# Altium PCB MAGIsCM4Core.PcbDoc
Units mm, origin at the board's own origin, x right, y up, seen from the top; angles counter-clockwise.
Board outline 41.1 x 41.3 mm, 4 copper layers (Component Side, Ground Plane, Signal Layer 1, Solder Side), stack 0.844 mm thick; 35 components, 65 nets, 195 pads, 70 vias.
Unrouted connection lines stored in the file: 2.
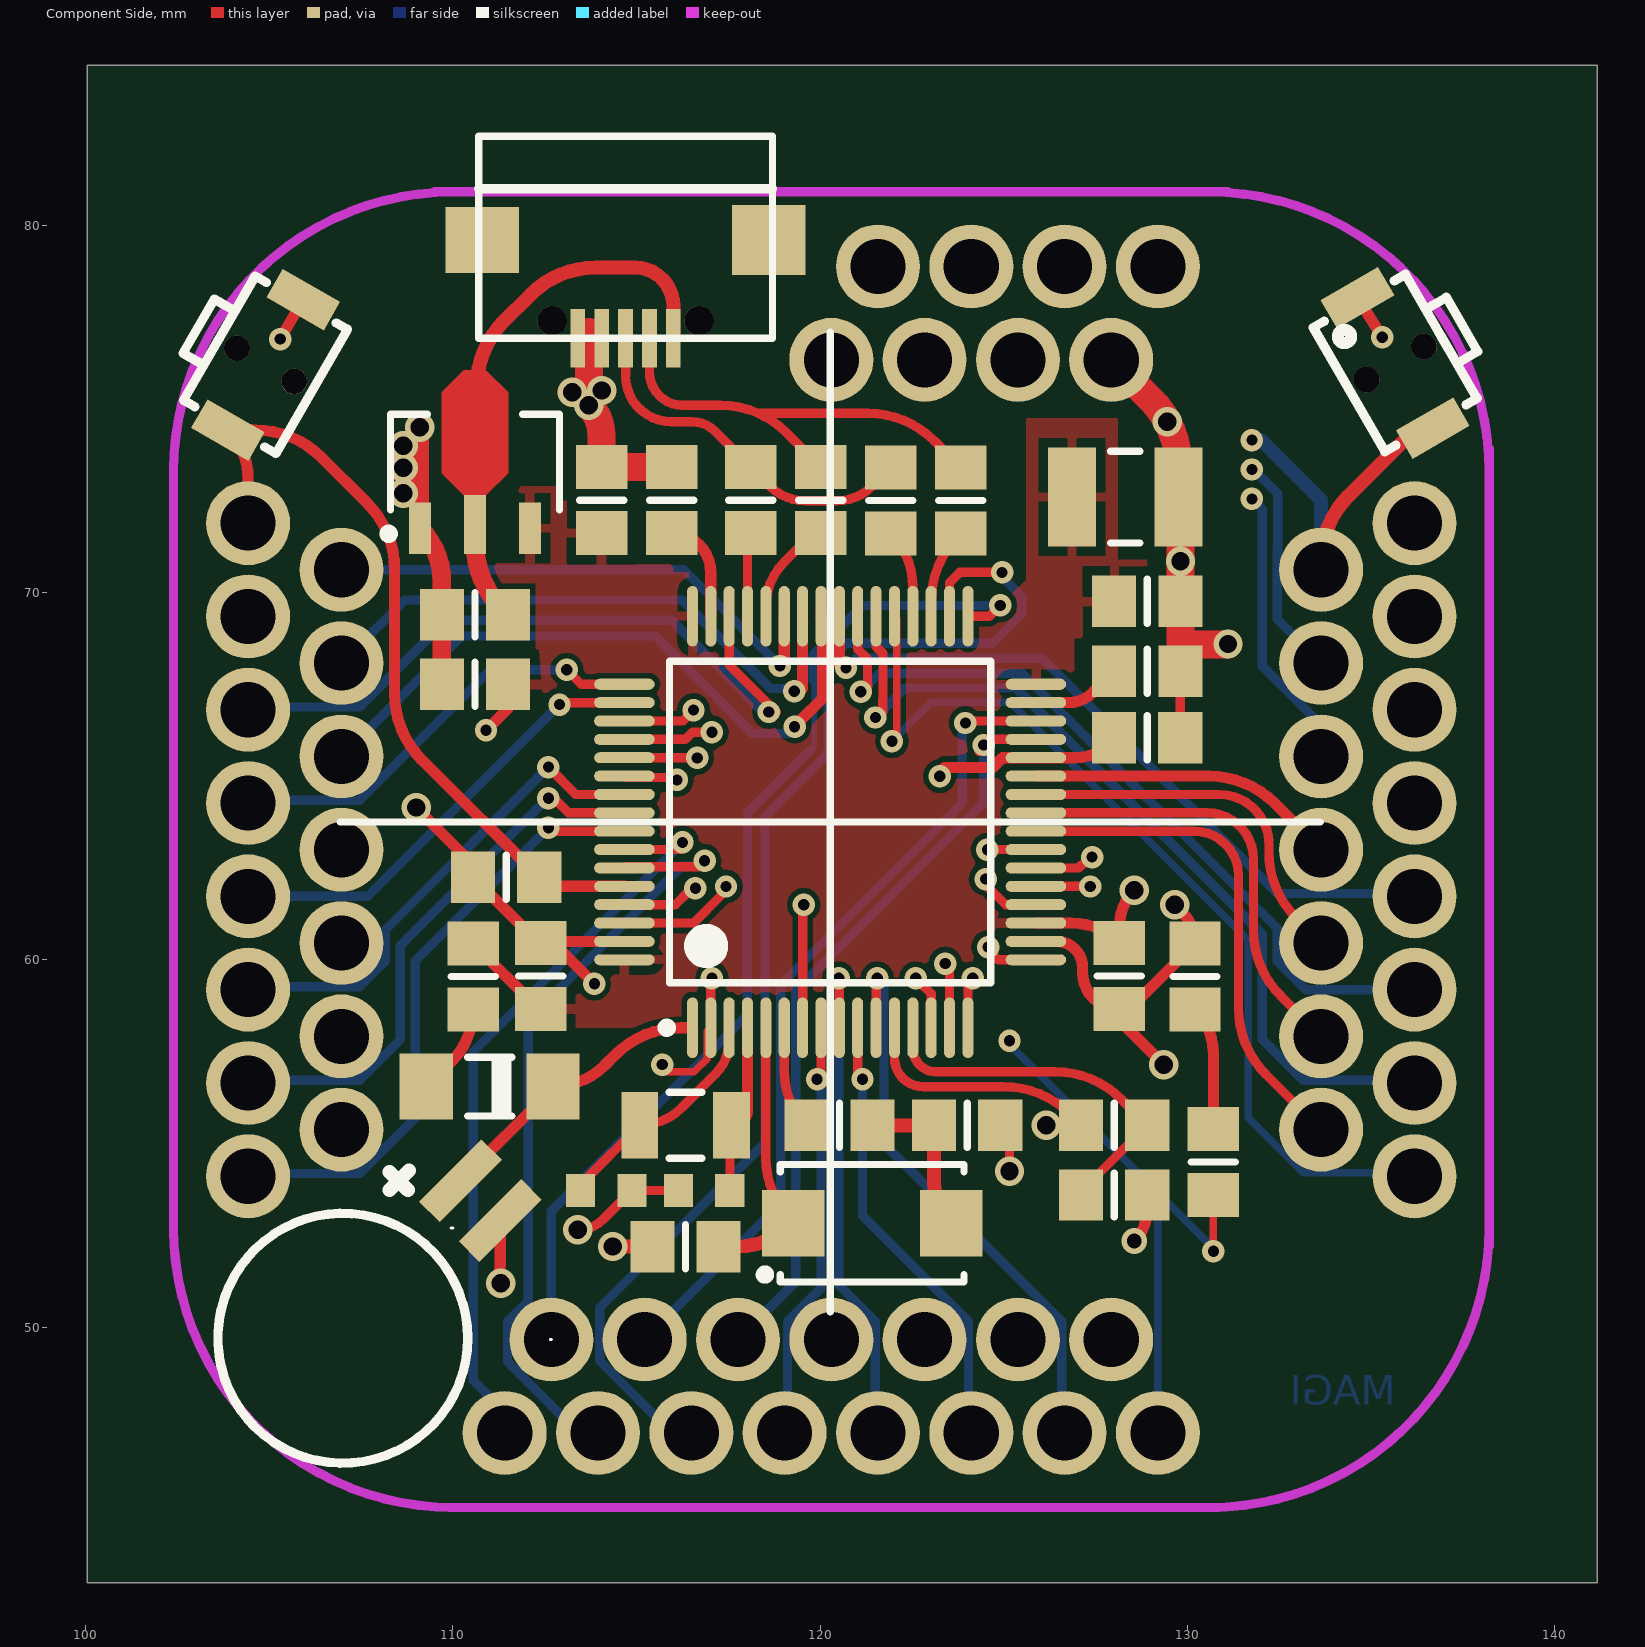
[diagram p0: Component Side view]
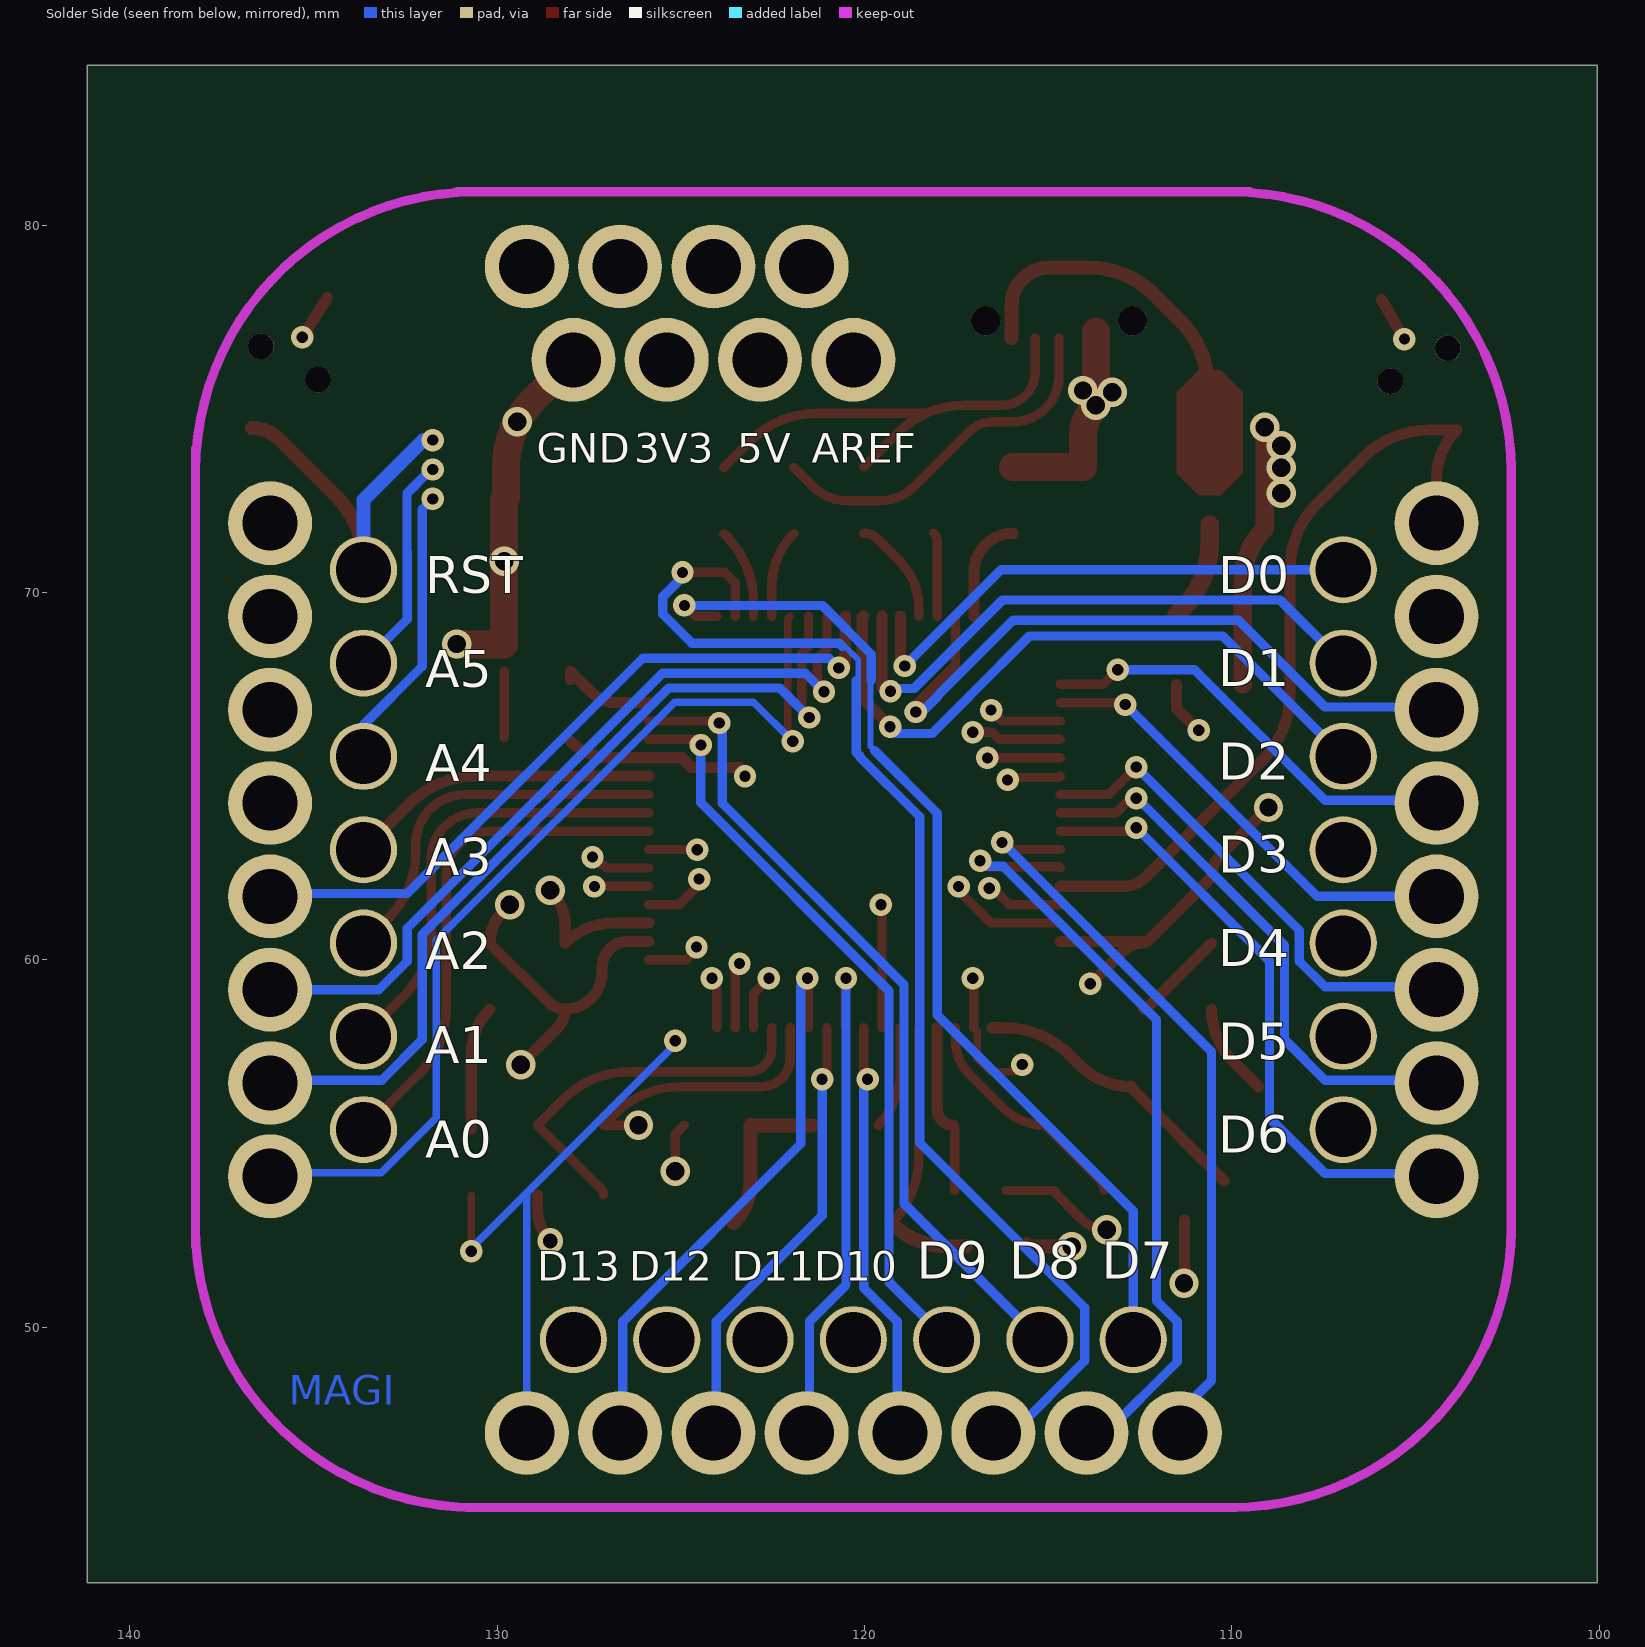
[diagram p1: Solder Side view, seen from below]
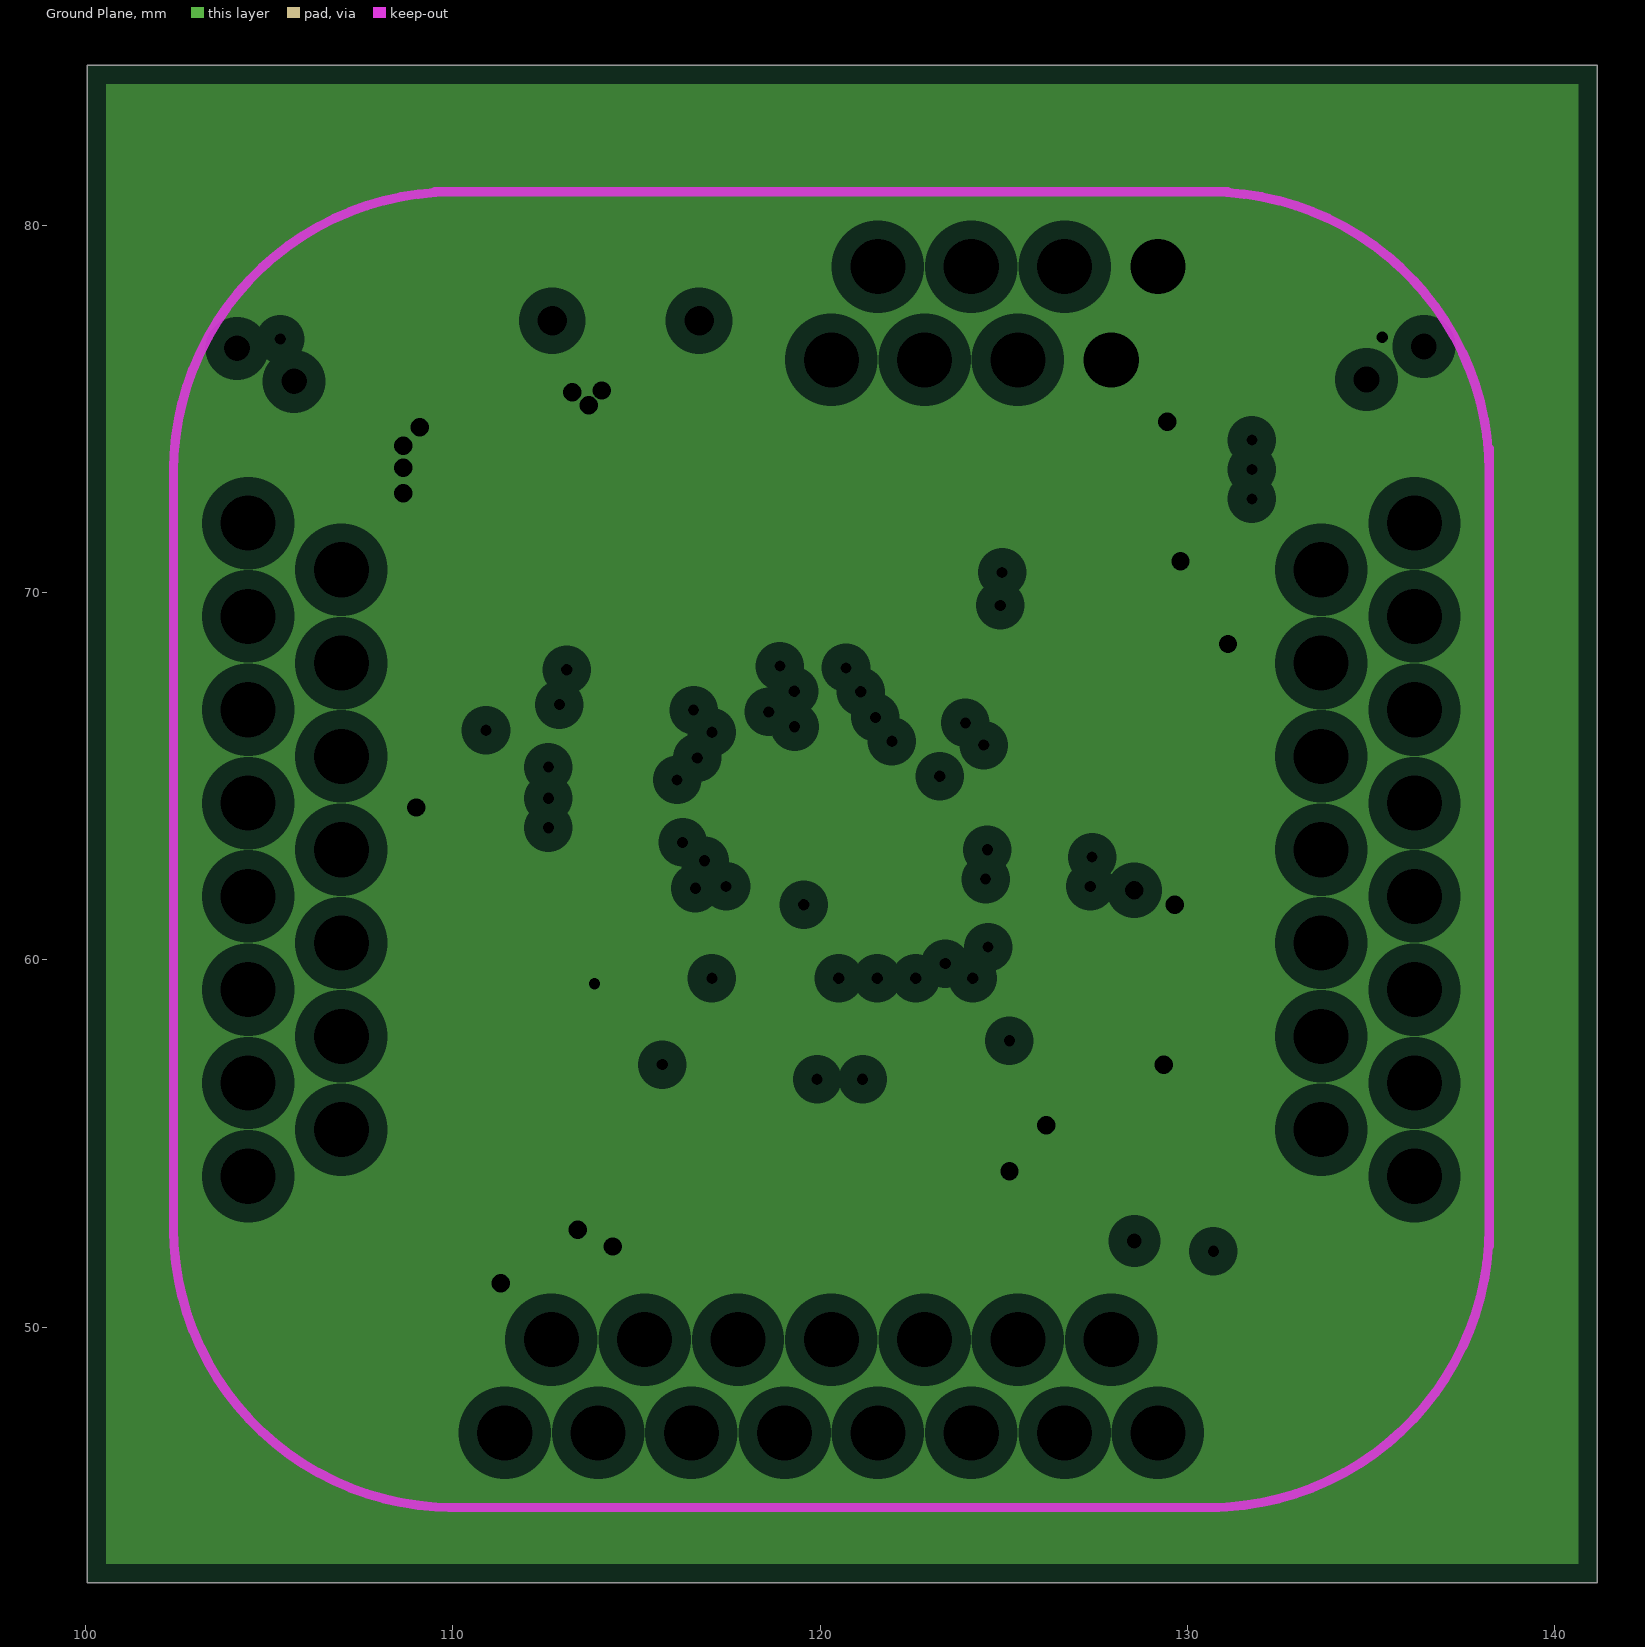
[diagram p2: Ground Plane, clearances drawn from the general rule]
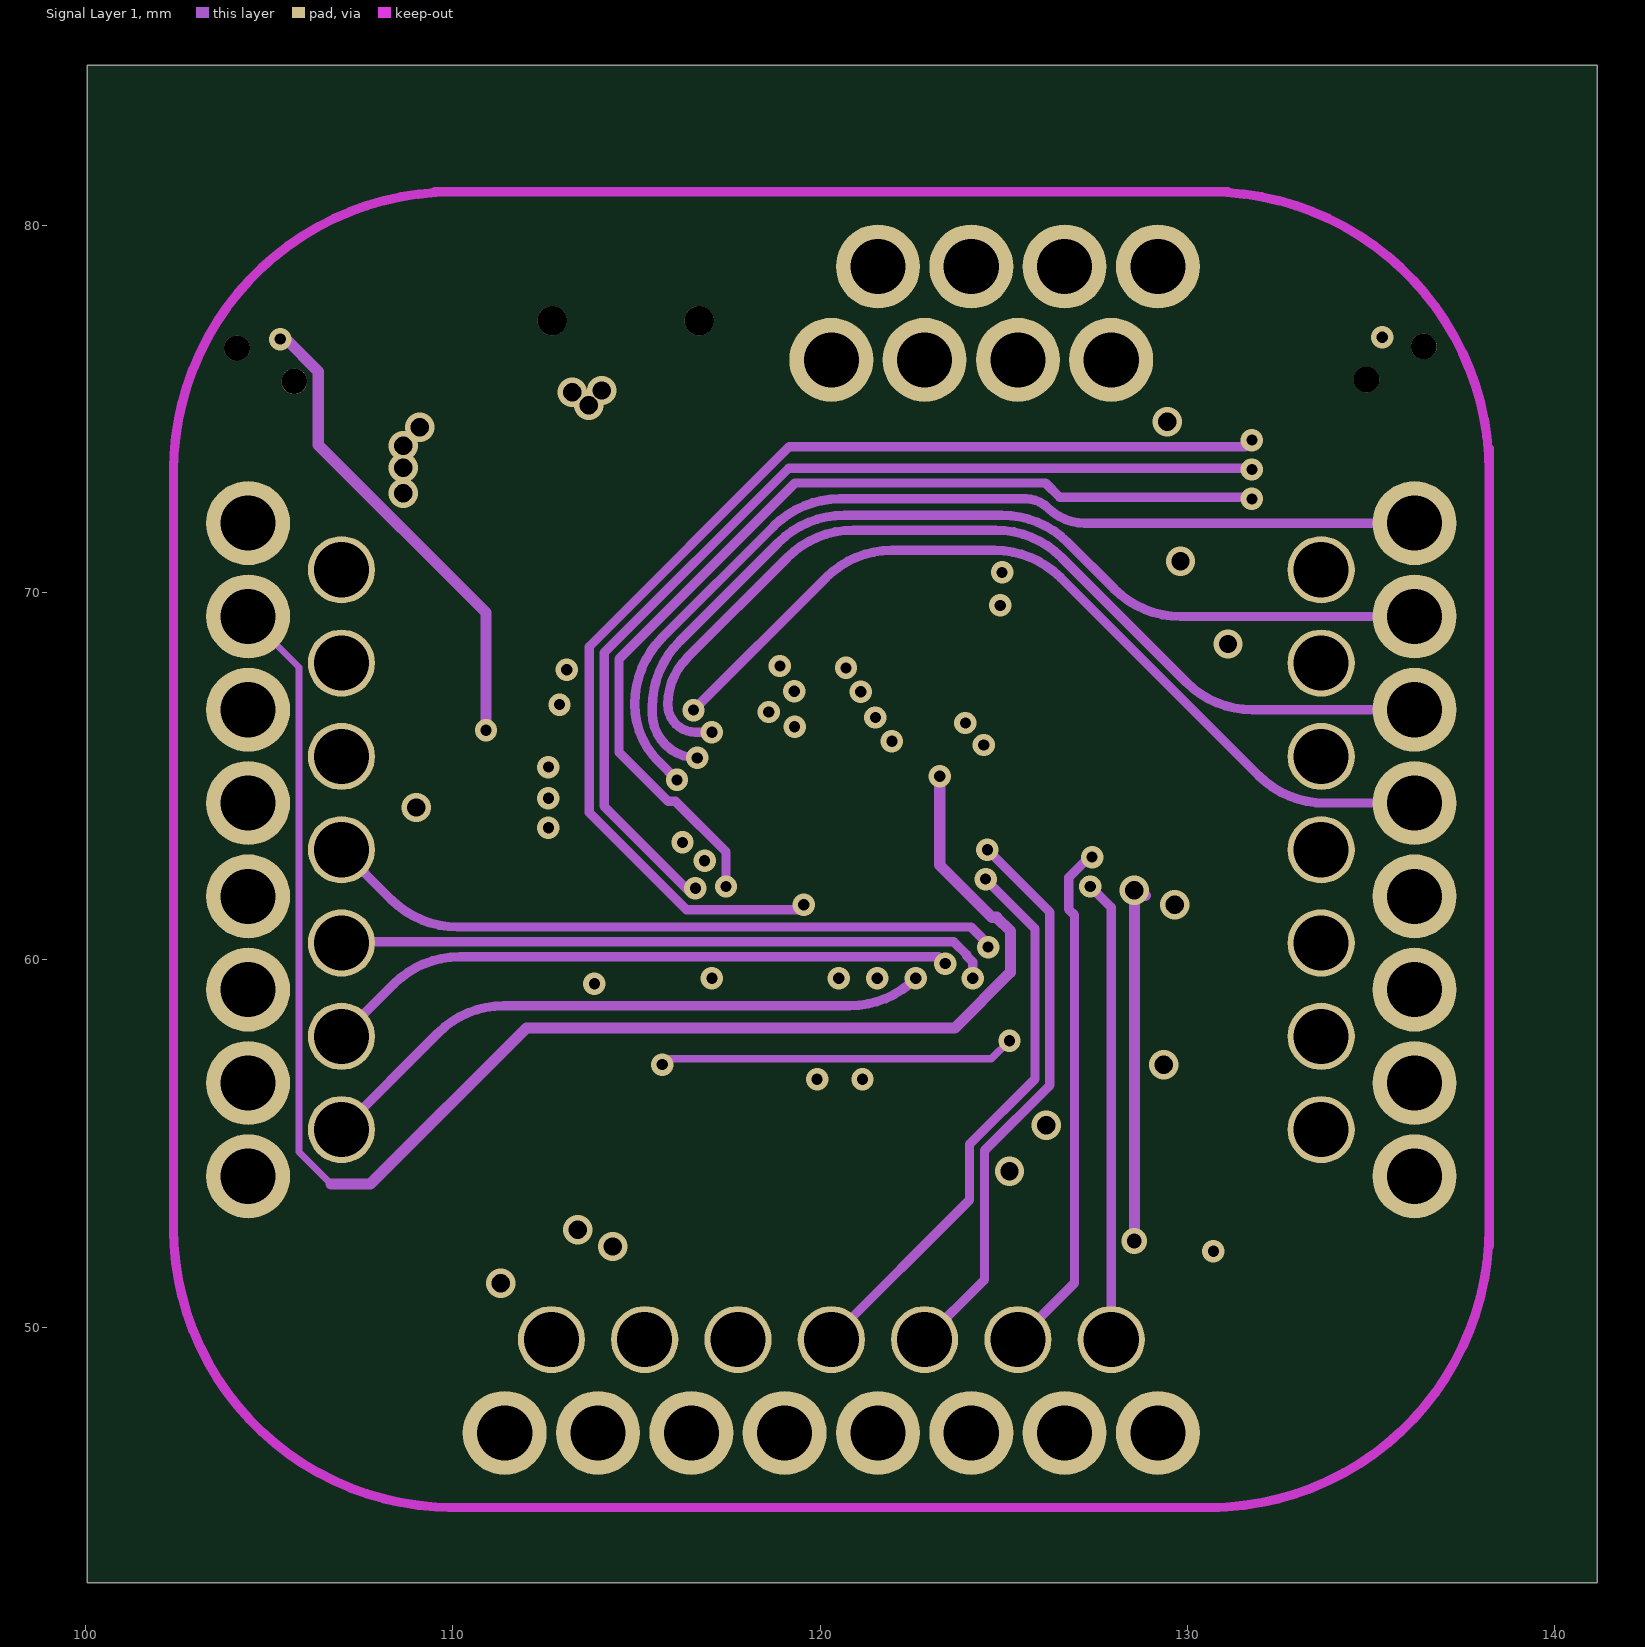
[diagram p3: Signal Layer 1]

## Layer stack, top to bottom
Top Solder: solder mask 0.0102, Solder Resist, Dk 3.5
Component Side: signal copper 0.0356
Dielectric 1: core 0.32, FR-4, Dk 4.8
Ground Plane: plane copper 0.036, net GND
Dielectric 3: prepreg 0.127, Dk 4.2
Signal Layer 1: signal copper 0.036
Dielectric 4: core 0.254, Dk 4.2
Solder Side: signal copper 0.0356
Bottom Solder: solder mask 0.0102, Solder Resist, Dk 3.5

## Board outline
100.05,84.35 141.15,84.35 141.15,43.15 141.15,43.05 100.05,43.05

## Design rules (kind name [scope] priority, off if disabled: settings)
Clearance Clearance_1 [InPolygon vs InNet('3.3V')] p1: gap=0.152
Clearance [All] p2: gap=0.152
ComponentClearance [All] p1: gap=0.254 collisioncheckmode=3 verticalgap=0.152 showdistances=FALSE
HoleToHoleClearance [All] p1: gap=0.152 allowstackedmicrovias=TRUE
PlaneClearance [All] p1: clearance=0.508
PlaneConnect [All] p1: planeconnectstyle=Relief reliefexpansion=0.508 reliefentries=4 reliefconductorwidth=0.254 reliefairgap=0.254
PolygonConnect [All] p1: connectstyle=Relief reliefconductorwidth=0.254 reliefentries=4 polygonreliefangle="90 Angle" airgapwidth=0.254
RoutingVias [All] p1: holewidth=0.305 width=0.61 viastyle="Through Hole" minholewidth=0.305 minwidth=0.61 maxholewidth=7.112 maxwidth=12.7
SolderMaskExpansion [All] p1: expansion=0.102
Width [All] p1: maxlimit=2.54 minlimit=0.152 preferedwidth=0.254
25 further rules are at their usual default settings.

## Components (designator, comment, footprint, x,y, rotation, side; value= is the part's Value field where it differs from the comment)
C1 "10uf" 6-0805_n 110.6,69.4 r180 top
C2 "10uf" 6-0805_n 110.6,67.5 r180 top
C3 "CAP" 6-0805_N 128.9,67.855 r180 top
C4 "CAP" 6-0805_N 115.951,72.517 r270 top
C5 "15PF" 6-0805_n 116.332,52.197 r0 top
C6 "15PF" 6-0805_n 124,55.5 r180 top
C7 "CAP" 6-0805_N 128,55.5 r180 top
C8 "15PF" 1608[0603] 114.173,53.721 r180 top
C9 "15PF" 1608[0603] 116.84,53.721 r0 top
C10 "10uf" C1210_N 128.3,72.6 r0 top
C11 "10uf" 3.3V0.2F-RK 110.75,53.45 r135 top
C12 "CAP" 6-0805_N 114.046,72.517 r270 top
C13 "CAP" 6-0805_N 112.395,59.563 r270 top
C14 "CAP" 6-0805_N 128.143,59.563 r90 top
C15 "CAP" 6-0805_N 128.9,69.76 r180 top
D1 "SOD123" LL34 111,56.55 r0 top
J1 "MAGIsBoard-2x" MAGIsBoard-2x 120.3,63 r0 top
L1 "INDUCTOR" 6-0805_n 128,53.6 r0 top
LED1 "LED_3" 6-0805_N 130.2,59.55 r90 top
R1 "10K" 6-0805_n 120.015,72.517 r90 top
R2 "10K" 6-0805_n 123.825,72.506 r90 top
R3 "10K" 6-0805_n 118.11,72.517 r90 top
R4 "10K" 6-0805_n 121.92,72.506 r90 top
R5 "10K" 6-0805_n 120.523,55.499 r0 top
R6 "10K" 6-0805_n 110.55,59.55 r270 top
R7 "RES1_1" 6-0805_N 130.7,54.5 r270 top
R8 "RES1_1" 6-0805_N 111.45,62.25 r0 top
R9 "RES1_1" 6-0805_N 128.9,66.05 r180 top
S1 "SW-PB" SKRELGE010 104.9,76.2 r240 top
S2 "SW-PB" SKRELGE010 135.65,76.25 r120 top
U1 "USB" microUSB 114.7,77.5 r0 top
U2 "STM32F415RG" STM32F415RG 120.269,63.754 r90 top
U3 "HS7333" HS7333 110.6,73.55 r90 top
X1 "8M" 5032 121.666,52.832 r270 top
X2 "32.768k" 3215 116.332,55.499 r0 top

## Footprints (in the part's own frame and the unit in brackets; to place one, negate y for a bottom-side part, rotate by r counter-clockwise, add the part's x,y. Pads: shape width x height; smd on the part's side, far side on the other; paste and mask are expansions set on the pad)
3.3V0.2F-RK [mm]
  rect 0.8x2.4 smd: 1(0.762,0) 2(-0.762,0)
  silkscreen extent -3.4,0.8 3.4,8.7
6-0805_n [mm] "Chip Resistor, Body 2.0x1.2mm, IPC Medium Density"
  rect 1.2x1.4 smd: 1(-0.9,0) 2(0.9,0)
  silkscreen extent 0,-0.6 0,0.6, body extent -1.07,-0.7 1.07,0.7, height 0.7
6-0805_N [mm] "Chip Resistor, Body 2.0x1.2mm, IPC Medium Density"
  rect 1.2x1.4 smd: 1(-0.9,0) 2(0.9,0)
  silkscreen extent 0,-0.6 0,0.6, body extent -1.07,-0.7 1.07,0.7, height 0.7
1608[0603] [mm] "Chip Capacitor, Body 1.6x0.8mm, IPC High Density"
  rect 0.8x0.9 smd: 1(-0.7,0) 2(0.7,0)
  body extent -0.87,-0.48 0.87,0.48, height 1.3
3215 [mm]
  rect 1x1.8 smd: 1(-1.25,0) 2(1.25,0)
  silkscreen extent -0.45,-0.9 0.45,0.9
5032 [mm]
  rect 1.8x1.7 smd: 1(0,-2.404) 2(0,1.896)
  silkscreen extent -1.6,-3.3 1.6,2.25
C1210_N [mm] "Chip Capacitor, Body 3.2x2.5mm, IPC Medium Density"
  rect 1.3x2.7 smd: 1(-1.45,0) 2(1.45,0)
  silkscreen extent -0.4,-1.25 0.4,1.25, body extent -1.7,-1.35 1.7,1.35, height 1.5
HS7333 [mm] "SOT89, 3-Leads, Body 4.50x2.50mm, Pitch 1.50mm, Lead Span 4.1mm, IPC Medium Density"
  rect 1.4x0.6 smd: 1(-1.8,1.5) 3(-1.8,-1.5)
  rect 1.6x0.6 smd: 2(-1.7,0)
  Component Side region: -0.9,0.3 -0.3,0.9 1.9,0.9 2.5,0.3 2.5,-0.3 1.9,-0.9 -0.3,-0.9 -0.9,-0.3
  silkscreen extent -2.07,-2.3 1.3,2.47, body extent -1.3,-2.3 1.3,2.3, height 1.6
LL34 [mm] "MELF Diode, 2-Leads, Body 3.50x1.50mm, IPC Low Density"
  rect 1.45x1.8 smd: 1(-1.725,0) 2(1.725,0)
  silkscreen extent -0.6,-0.8 0.6,0.8, body extent -1.85,-0.77 1.85,0.77, height 1.53
MAGIsBoard-2x [mil]
  round 90 hole 59.06: 1(300,525) 1(350,625) 2(200,525) 2(250,625) 3(100,525) 3(150,625) 4(0,525) 4(50,625) 29(-625,350) 30(-625,250) 31(-625,150) 32(-625,50) 33(-625,-50) 34(-625,-150) 35(-625,-250) 36(-625,-350) 37(-350,-625) 38(-250,-625) 39(-150,-625) 40(-50,-625) 41(50,-625) 42(150,-625) 43(250,-625) 44(350,-625) 45(625,-350) 46(625,-250) 47(625,-150) 48(625,-50) 49(625,50) 50(625,150) 51(625,250) 52(625,350)
  round 90 / inner round 72 / far side round 72 hole 59.06: 8(-525,300) 9(-525,200) 10(-525,100) 11(-525,0) 12(-525,-100) 13(-525,-200) 14(-525,-300) 15(-300,-525) 16(-200,-525) 17(-100,-525) 18(0,-525) 19(100,-525) 20(200,-525) 21(300,-525) 22(525,-300) 23(525,-200) 24(525,-100) 25(525,0) 26(525,100) 27(525,200) 28(525,300)
  Keep-Out Layer lines w10: -705,-415 -705,415 ; -705,-405 ccw(c-405,-405) -405,-705 ; -705,405 cw(c-405,405) -405,705 ; -425,705 425,705 ; -410,-705 415,-705 ; 405,-705 ccw(c405,-405) 705,-405 ; 405,705 cw(c405,405) 705,405 ; 705,-425 705,430
  silkscreen extent 543,543 557,557
microUSB [mm]
  round 0.8 hole 0.8: 0(-2,-0.1) 0(2,-0.1)
  rect 0.4x1.6 smd: 1(1.3,-0.575) 2(0.65,-0.575) 3(0,-0.575) 4(-0.65,-0.575) 5(-1.3,-0.575)
  rect 2x1.8 smd: 6(-3.9,2.099)
  rect 2x1.9 smd: 7(3.9,2.099)
  silkscreen extent -4,-0.58 4,4.92, body extent -4.1,-0.68 4.1,5.02, height 3
SKRELGE010 [mm]
  round 0.7 hole 0.7: 0(0,0.9) 0(0,-0.9)
  rect 0.9x1.8 smd: 1(-2.05,0) 2(2.05,0)
  silkscreen extent -1.95,-2.1 1.95,1.45
STM32F415RG [mm] "TSQFP, 64-Leads, Body 10.00x10.00mm, Pitch 0.50mm, IPC Medium Density"
  oval 1.65x0.3 smd: 1(-5.6,3.75) 2(-5.6,3.25) 3(-5.6,2.75) 4(-5.6,2.25) 5(-5.6,1.75) 6(-5.6,1.25) 7(-5.6,0.75) 8(-5.6,0.25) 9(-5.6,-0.25) 10(-5.6,-0.75) 11(-5.6,-1.25) 12(-5.6,-1.75) 13(-5.6,-2.25) 14(-5.6,-2.75) 15(-5.6,-3.25) 16(-5.6,-3.75) 33(5.6,-3.75) 34(5.6,-3.25) 35(5.6,-2.75) 36(5.6,-2.25) 37(5.6,-1.75) 38(5.6,-1.25) 39(5.6,-0.75) 40(5.6,-0.25) 41(5.6,0.25) 42(5.6,0.75) 43(5.6,1.25) 44(5.6,1.75) 45(5.6,2.25) 46(5.6,2.75) 47(5.6,3.25) 48(5.6,3.75)
  oval 0.3x1.65 smd: 17(-3.75,-5.6) 18(-3.25,-5.6) 19(-2.75,-5.6) 20(-2.25,-5.6) 21(-1.75,-5.6) 22(-1.25,-5.6) 23(-0.75,-5.6) 24(-0.25,-5.6) 25(0.25,-5.6) 26(0.75,-5.6) 27(1.25,-5.6) 28(1.75,-5.6) 29(2.25,-5.6) 30(2.75,-5.6) 31(3.25,-5.6) 32(3.75,-5.6) 49(3.75,5.6) 50(3.25,5.6) 51(2.75,5.6) 52(2.25,5.6) 53(1.75,5.6) 54(1.25,5.6) 55(0.75,5.6) 56(0.25,5.6) 57(-0.25,5.6) 58(-0.75,5.6) 59(-1.25,5.6) 60(-1.75,5.6) 61(-2.25,5.6) 62(-2.75,5.6) 63(-3.25,5.6) 64(-3.75,5.6)
  silkscreen extent -5.72,-4.37 4.37,4.57, body extent -5,-5 5,5, height 1.6

## Part data
C1 C2 C10 C11: library part "CAPACITOR POL", "Capacitor"
C3 C4 C7 C12 C13 C14 C15: library part CAP_1, "Capacitor"
C5 C6 C8 C9: library part CAP
D1: library part "DIODE SCHOTTKY_1", "Schottky Diode"
R1 R2 R3 R4 R5 R6: library part RES
X1 X2: library part CRYSTAL

## Via types
v1: diameter 0.61, hole 0.305, Component Side to Solder Side, 50 vias
v2: diameter 0.8, hole 0.5, Component Side to Solder Side, 19 vias
v3: diameter 0.7, hole 0.4, Component Side to Solder Side, 1 vias

## Nets (pads, with @x,y where several pads share a name; then routed paths per layer and width w, separated by ;. In a path a pad name is that pad's centre, name@x,y a point inside that pad or via, vN(x,y) a via of type N, cw(c..) or ccw(c..) an arc to the next point about the centre after c; other vN are vias at no path point)
3.3V: C2.1 C10.1 C12.2 C13.2 C14.2 C15.2 J1.2 L1.2 R6.1 S1.1 U2.19 U2.32 U2.48 U2.64 U3.3 | length 33.6
  Component Side w0.305: v1(105.3,76.9) S1.1 ; R6.1 112.296,58.704 ccw(c112.395,58.803) C13.2 ; v1(110.9,66.25) 111.5,66.85 C2.1 ; U2.19 126.837,61.004 cw(c126.837,59.157) C14.2 128.143,60.917 cw(c129.533,60.917) v2(128.55,61.9) ; v3(128.55,52.35) ccw(c127.705,53.195) 128.9,53.195 L1.2
  Signal Layer 1 w0.305: v1(105.3,76.9) 105.455,76.9 106.334,76.021 106.334,74.019 110.9,69.453 v1(110.9,66.25) ; v3(128.55,52.35) v2(128.55,61.9) 128.7,61.9 v2@128.85,61.75
5V: C1.1 J1.3 U1.1 U3.2 | length 12.9
  Component Side w0.381: 110.65,73.95 110.65,75.598 cw(c113.19,75.598) 111.394,77.394 112.106,78.106 cw(c113.902,76.31) 113.902,78.85 114.95,78.85 cw(c114.95,77.8) 116,77.8 U1.1
  Component Side w0.508: U3.2 110.6,71.352 ccw(c113.14,71.352) 111.344,69.556 C1.1
BOOT0: J1.29 R8.2 S1.2 U2.60 | length 21.5
  Component Side w0.305: J1.29 104.425,73.097 ccw(c102.547,73.097) S1.2 104.623,74.425 cw(c104.623,71.885) 106.419,73.681 107.669,72.431 cw(c105.873,70.635) 108.413,70.635 108.413,67.239 ccw(c110.953,67.239) 109.157,65.443 R8.2 ccw(c112.944,62.844) 112.944,62.004 U2.60
GND: C1.2 C2.2 C3.1 C4.1 C5.1 C6.1 C7.2 C8.1 C9.1 C10.2 C11.2 C12.1 C13.1 C14.1 C15.1 J1.1 LED1.2 R8.1 R9.1 S2.2 U1.4 U1.5 U1.6 U1.7 U2.12 U2.18 U2.63 U3.1 | length 60.1
  Component Side w0.254: v2(113.4,52.65) ccw(c113.4,53.621) 114.086,52.934 C8.1 ; C8.1@114.784,53.684 cw(c114.873,53.595) C8.1 ; C5.1 C5.1@115.563,52.328 ; C9.1 C8.1 ; U2.12 122.019,57.331 ccw(c122.8,57.331) 122.8,56.55 124.998,56.55 cw(c124.998,54.01) 126.794,55.806 C7.2 v2@125.95,55.5 ; v2@124.9,54.3 125.15,54.55 125.15,55.25 C6.1 ; R9.1 C3.1
  Component Side w0.305: v2(109,64.15) 110.303,62.847 cw(c109.705,62.25) R8.1 112.296,60.504 U2.63 ; v2@111.1,51.25 ccw(c110.644,51.706) 111.289,51.706 C11.2 ; C13.1 cw(c112.395,59.637) 112.979,60.221 v1(113.85,59.35) ; U2.18 126.434,60.504 cw(c126.434,59.8) 127.138,59.8 127.138,59.668 ccw(c128.143,59.668) C14.1 ; v2(129.35,57.15) 128.359,58.141 cw(c128.882,58.663) C14.1 ; v2(129.65,61.5) 129.846,61.304 cw(c128.993,60.45) LED1.2 ; LED1.2@130.2,60.684 LED1.2 ; S2.2 v1(135.3,76.95) ; C14.1 ccw(c128.143,59.315) 128.604,58.854 LED1.2
  Component Side w0.381: v2@114.15,52.2 114.153,52.197 C5.1
  Component Side w0.508: v2(109.1,74.5) U3.1 cw(c107.652,70.302) 109.7,70.302 C2.2
  Component Side w0.762: 113.7,77.1 v2(113.7,75.1) cw(c112.865,74.265) 114.046,74.265 C12.1 C4.1 ; J1.1@127.92,76.335 129.006,75.249 cw(c127.21,73.453) 129.75,73.453 C10.2 cw(c129.75,72.545) 129.805,72.545 v2(129.805,70.85) 129.805,68.58 131.08,68.58 v2(131.1,68.6)
  other v2: 111.3,51.2 114.35,52.2 125.15,54.25 126.15,55.5 108.65,72.7 108.65,73.4 108.65,74 129.45,74.65 113.25,75.45 114.05,75.5
NetC3_2: C3.2 U2.31 | length 2.7
  Component Side w0.305: U2.31 126.75,67.004 ccw(c126.75,67.967) 127.431,67.286 C3.2 C3.2@128,67.633
NetC4_2: C4.2 U2.47 | length 2.9
  Component Side w0.305: C4.2 cw(c115.951,70.549) 117.019,70.549 U2.47
NetC6_2: C6.2 R5.2 X1.2 | length 4.5
  Component Side w0.381: R5.2 123.099,55.499 C6.2 123.1,53.947 ccw(c124.677,53.947) X1.2
NetC7_1: C7.1 L1.1 U2.13 | length 10.4
  Component Side w0.254: U2.13 122.519,57.587 ccw(c123.15,57.587) 123.15,56.956 126.391,56.956 cw(c126.391,54.416) 128.188,56.212 C7.1 127.171,53.771 ccw(c127.342,53.6) L1.1
NetD1_1: D1.1 R6.2 | length 2.5
  Component Side w0.305: D1.1 109.967,57.242 ccw(c108.558,58.65) R6.2
NetLED1_1: LED1.1 R7.1 | length 3.4
  Component Side w0.305: LED1.1 cw(c128.993,57.443) 130.7,57.443 R7.1
NRST: J1.28 S2.1 U2.7 | length 44.9
  Component Side w0.254: U2.7 v1@119.519,61.5
  Component Side w0.381: J1.28 133.635,70.833 cw(c136.175,70.833) 134.379,72.629 135.906,74.156 cw(c136.675,73.387) S2.1
  Signal Layer 1 w0.254: v1(119.55,61.5) 119.416,61.366 116.358,61.366 113.709,64.015 113.709,68.528 119.151,73.971 131.571,73.971 v1(131.75,74.15)
  Solder Side w0.381: v1(131.75,74.15) 132,74.15 133.635,72.515 J1.28
OSC32_IN: C8.2 U2.3 X2.1 | length 6.4
  Component Side w0.254: C8.2 cw(c113.881,53.721) 113.592,54.009 X2.1 ccw(c115.082,57.109) 116.221,55.971 117.15,56.9 ccw(c116.259,57.791) 117.152,56.902 ccw(c116.259,57.791) 117.519,57.791 U2.3
OSC32_OUT: C9.2 U2.4 X2.2 | length 4.7
  Component Side w0.254: C9.2 117.54,55.398 cw(c117.683,55.398) X2.2
  Component Side w0.305: X2.2 ccw(c117.582,55.936) 118.019,55.936 U2.4
OSC_IN: C5.2 U2.5 X1.1 | length 7.7
  Component Side w0.254: U2.5 118.519,54.626 ccw(c121.056,54.626) X1.1
  Component Side w0.381: C5.2 117.729,52.197 ccw(c117.729,54.365) X1.1
OSC_OUT: R5.1 U2.6 | length 2.8
  Component Side w0.254: U2.6 119.019,56.957 ccw(c121.081,56.957) R5.1
PA0: J1.14 U2.14 | length 18.5
  Component Side w0.254: v1@122.7,59.4 123.019,59.081 U2.14
  Signal Layer 1 w0.254: J1.14 109.595,58.01 cw(c111.391,56.214) 111.391,58.754 120.802,58.754 ccw(c120.802,61.294) 122.598,59.498 v1(122.6,59.5)
PA1: J1.13 U2.15 | length 18.9
  Component Side w0.254: U2.15 v1@123.519,59.731
  Signal Layer 1 w0.254: J1.13 108.385,59.34 cw(c110.181,57.544) 110.181,60.084 123.216,60.084 v1(123.4,59.9)
PA2: J1.12 U2.16 | length 19.3
  Component Side w0.254: U2.16 v1@124.019,59.6
  Signal Layer 1 w0.254: J1.12 106.996,60.491 123.636,60.491 123.984,60.142 ; 123.984,60.108 124.15,59.942 v1(124.15,59.5)
PA3: J1.11 U2.17 | length 20.2
  Component Side w0.254: v1(124.568,60.35) 124.5,60.35 124.846,60.004 U2.17
  Signal Layer 1 w0.254: J1.11 108.324,61.641 ccw(c110.12,63.437) 110.12,60.897 124.103,60.897 124.5,60.5 124.5,60.418 v1(124.568,60.35)
PA4: J1.18 U2.20 | length 17.3
  Component Side w0.254: v1(124.5,62.2) 124.5,62.05 125.045,61.504 U2.20
  Signal Layer 1 w0.254: J1.18 120.3,49.7 124.064,53.464 124.064,54.979 125.844,56.759 125.844,60.85 v1@124.497,62.197 ; v1@124.5,62.05 v1(124.5,62.2)
PA5: J1.21 U2.21 | length 14.1
  Component Side w0.254: U2.21 127.246,62.004 127.25,62 v1(127.35,62)
  Signal Layer 1 w0.254: v1(127.35,62) 127.92,61.43 J1.21
PA6: J1.20 U2.22 | length 15.8
  Component Side w0.254: U2.22 127.028,62.504 127.108,62.584 127.134,62.584 v1@127.4,62.85
  Signal Layer 1 w0.254: J1.20 126.919,51.204 126.919,61.222 126.766,61.375 126.766,62.242 127.324,62.8 v1(127.4,62.8)
PA7: J1.19 U2.23 | length 16.8
  Component Side w0.254: v1@124.55,63.05 124.596,63.004 U2.23
  Signal Layer 1 w0.254: J1.19 124.471,51.296 124.471,54.811 126.25,56.59 126.25,61.3 v1(124.55,63)
PA8: J1.10 U2.41 | length 18.2
  Component Side w0.305: v1@119.25,66.409 119.25,66.4 v1(119.3,66.35) ; v1@119.441,66.5 120.06,67.119 120.06,69.313 U2.41
  Solder Side w0.254: J1.10 110.243,68.818 115.508,68.818 117.134,67.192 117.134,67.184 118.153,66.166 119.125,66.166 v1@119.304,66.345 ; v1@119.25,66.409 119.25,66.4 v1(119.3,66.35)
PA9: J1.9 U2.42 | length 16.2
  Component Side w0.305: v1@119.519,67.39 U2.42
  Solder Side w0.254: J1.9 108.685,69.8 116.238,69.8 118.647,67.39 119.39,67.39 119.312,67.312 v1(119.29,67.312)
PA10: J1.8 U2.43 | length 14.4
  Component Side w0.305: v1@119.019,67.95 U2.43
  Solder Side w0.254: J1.8 116.28,70.62 v1(118.9,68)
PA11: R1.1 U2.44 | length 2.9
  Component Side w0.254: U2.44 118.519,69.624 cw(c120.226,69.624) 119.019,70.831 119.657,71.469 cw(c120.015,71.11) R1.1
PA12: R3.1 U2.45 | length 2.3
  Component Side w0.254: U2.45 118.019,71.397 cw(c118.33,71.397) R3.1
PA13: J1.31 U2.46 | length 19.9
  Component Side w0.254: U2.46 117.519,68.031 118.8,66.75 v1(118.6,66.75)
  Solder Side w0.254: J1.31 104.501,66.886 107.459,66.886 109.823,69.25 115.95,69.25 117.95,67.25 ; 117.984,67.2 118.434,66.75 118.8,66.75 v1(118.6,66.75)
PA14: J1.32 U2.49 | length 11.9
  Component Side w0.254: v1(113.1,67.9) 113.496,67.504 U2.49
  Solder Side w0.254: J1.32 104.501,64.346 107.459,64.346 111.013,67.9 v1(113.1,67.9)
PA15: J1.33 U2.50 | length 12.4
  Component Side w0.254: v1@112.9,67 112.904,67.004 U2.50
  Solder Side w0.254: J1.33 107.68,61.73 v1(112.9,66.95)
PB0: J1.24 U2.26 | length 10.3
  Component Side w0.254: U2.26 130.864,64.504 cw(c130.864,63.155) 132.199,63.349 cw(c130.864,63.155) 132.213,63.155 132.213,62.935 ccw(c134.753,62.935) 132.957,61.138 J1.24
PB1: J1.25 U2.27 | length 8.5
  Component Side w0.305: U2.27 130.579,65.004 cw(c130.579,62.464) 132.375,64.26 J1.25
PB2: J1.30 R9.2 U2.28 | length 48.4
  Component Side w0.305: v1@123.35,65.2 123.39,65.24 124.703,65.24 124.966,65.504 U2.28 126.923,65.504 ccw(c126.923,67.027) R9.2@128,65.95
  Signal Layer 1 w0.178: J1.30 105.809,67.966 105.809,54.773 106.683,53.9
  Signal Layer 1 w0.305: 106.683,53.9 107.75,53.9 112,58.15 123.662,58.15 125.178,59.666 125.178,60.784 124.803,61.16 124.678,61.16 123.25,62.588 v1(123.25,65)
PB3: J1.34 U2.55 | length 13.6
  Component Side w0.254: v1(112.6,65.25) 113.346,64.504 U2.55
  Solder Side w0.254: J1.34 104.501,59.266 107.459,59.266 108.159,59.966 108.159,60.809 v1(112.6,65.25)
PB4: J1.35 U2.56 | length 15.1
  Component Side w0.254: v1(112.6,64.4) 112.75,64.4 113.15,64 ; 113.146,64.004 U2.56
  Solder Side w0.254: J1.35 104.501,56.726 107.459,56.726 108.565,57.832 108.565,60.391 112.574,64.4 v1(112.6,64.4)
PB5: J1.36 U2.57 | length 16.5
  Component Side w0.254: v1@112.75,63.55 112.796,63.504 U2.57
  Solder Side w0.254: J1.36 104.501,54.186 107.459,54.186 108.972,55.698 108.972,59.972 v1(112.6,63.6)
PB6: J1.37 U2.58 | length 20.3
  Component Side w0.254: U2.58 v1@116.2,63.004
  Solder Side w0.254: J1.37 111.41,47.69 110.55,48.55 110.55,57.5 v1(116.25,63.2)
PB7: J1.38 U2.59 | length 21.7
  Component Side w0.254: U2.59 114.699,62.534 116.684,62.534 v1(116.85,62.7)
  Solder Side w0.254: J1.38 113.422,47.125 111.486,49.06 111.486,50.16 112.048,50.722 112.048,58.375 116.224,62.55 116.7,62.55 v1(116.85,62.7)
PB8: J1.27 U2.61 | length 35.1
  Component Side w0.254: U2.61 116.054,61.504 v1@116.425,61.875
  Signal Layer 1 w0.254: v1@116.4,61.9 114.115,64.185 114.115,68.359 119.143,73.387 131.713,73.387 v1(131.75,73.35)
  Solder Side w0.254: v1@131.85,73.35 131.85,73.3 132.45,72.7 132.45,71.132 132.441,71.123 132.441,69.274 J1.27
  other v1: 116.6,61.95
PB9: J1.26 U2.62 | length 37.9
  Component Side w0.254: U2.62 116.554,61.004 v1@117.334,61.784
  Signal Layer 1 w0.254: v1@117.434,61.834 117.434,62.942 116.06,64.316 115.858,64.316 114.521,65.652 114.521,68.191 119.311,72.981 126.13,72.981 126.518,72.594 131.706,72.594 v1(131.75,72.55)
  Solder Side w0.254: v1(131.75,72.55) 132.035,72.265 132.035,67.992 133.635,66.392 J1.26
  other v1: 117.434,62
PB10: J1.17 U2.29 | length 20.6
  Component Side w0.254: v1@124.325,65.675 124.654,66.004 U2.29
  Solder Side w0.254: J1.17 119.328,51.233 119.328,59.154 124.45,64.276 v1(124.45,65.85)
PB11: J1.16 U2.30 | length 22.3
  Component Side w0.254: v1@123.95,66.504 U2.30
  Solder Side w0.254: J1.16 118.922,53.367 118.922,59.323 123.866,64.267 v1@123.866,66.45
  other v1: 123.95,66.45
PB12: J1.15 U2.33 | length 28.3
  Component Side w0.254: U2.33 124.604,69.354 v1(124.9,69.65)
  Solder Side w0.152: J1.15 J1.15@112.704,49.665 ; 119.723,65.7 119.833,65.81 119.833,67.617
  Solder Side w0.254: J1.15 112.68,53.166 118.014,58.5 118.014,61.749 118.018,61.754 118.018,63.995 119.723,65.7 ; 119.811,67.617 119.811,68.318 121.143,69.65 v1(124.9,69.65)
PB13: J1.39 U2.34 | length 34.5
  Component Side w0.254: U2.34 123.519,70.269 123.8,70.55 v1@124.8,70.55
  Solder Side w0.152: 120.167,67.606 120.167,68.171 120.564,68.568 120.636,68.568
  Solder Side w0.254: J1.39 115.962,47.125 114,49.087 114,50.53 118.496,55.026 118.496,63.898 120.129,65.532 120.129,65.559 120.217,65.646 120.217,67.606 ; 120.602,68.534 120.636,68.568 120.687,68.619 124.695,68.619 125.484,69.408 125.484,69.892 124.95,70.426 v1(124.95,70.55)
PB14: R2.1 U2.35 | length 2.5
  Component Side w0.254: U2.35 123.019,69.748 cw(c125.559,69.748) 123.763,71.544 R2.1
PB15: R4.1 U2.36 | length 2.4
  Component Side w0.254: R4.1 cw(c120.474,70.16) 122.519,70.16 U2.36
PC0: J1.40 U2.8 | length 11.7
  Component Side w0.254: v1(119.913,56.75) 119.95,56.75 120.019,56.819 U2.8
  Solder Side w0.254: J1.40 119.106,47.201 119.106,50.16 120.019,51.072 120.019,56.819 119.95,56.75 v1(119.913,56.75)
PC1: J1.41 U2.9 | length 14.2
  Component Side w0.254: U2.9 v1@120.519,59.431
  Solder Side w0.254: v1(120.5,59.5) 120.5,51.153 121.494,50.16 121.494,47.106 J1.41@121.6,47
PC2: J1.42 U2.10 | length 12.7
  Component Side w0.254: U2.10 121.019,56.819 v1@121.088,56.75 ; v1@121.05,56.75 v1@121.088,56.75 ; v1@121.088,56.75 121.138,56.7 121.15,56.7 121.2,56.75 v1(121.15,56.75) v1@121.088,56.75
  Solder Side w0.254: v1(121.15,56.75) 121.15,53.043 124.034,50.16 124.034,47.116 J1.42@124.15,47
PC3: J1.43 U2.11 | length 15.7
  Component Side w0.254: U2.11 v1@121.519,59.369
  Solder Side w0.254: v1(121.55,59.5) 121.734,59.316 121.734,56.508 121.734,54.999 126.574,50.16 126.574,47.201 J1.43
PC4: J1.22 U2.24 | length 13.9
  Component Side w0.254: U2.24 130.182,63.504 cw(c130.182,62.3) 131.386,62.3 131.386,58.682 ccw(c133.926,58.682) 132.129,56.886 J1.22
PC5: J1.23 U2.25 | length 12.1
  Component Side w0.254: U2.25 130.538,64.004 cw(c130.538,62.75) 131.792,62.75 131.792,60.815 ccw(c134.332,60.815) 132.536,59.019 J1.23
PC6: J1.45 U2.37 | length 26.1
  Component Side w0.203: U2.37 122.087,69.286 122.087,66.163 v1@122.1,66.15
  Solder Side w0.203: v1(121.95,65.95) 123.019,67.019 125.167,67.019 131.654,60.533 131.654,55.709 133.151,54.212 136.073,54.212 J1.45
PC7: J1.46 U2.38 | length 23.8
  Component Side w0.254: U2.38 121.519,68.532 121.706,68.345 121.706,67.094 121.7,67.088 v1@121.7,66.75
  Solder Side w0.254: v1(121.5,66.6) 122.3,67.4 125.325,67.4 132.035,60.69 132.035,57.832 133.141,56.726 136.099,56.726 J1.46
PC8: J1.47 U2.39 | length 21.4
  Component Side w0.254: U2.39 121.019,68.457 121.284,68.192 121.284,67.466 v1@121.3,67.45
  Solder Side w0.254: v1(121.1,67.3) 121.606,67.806 125.494,67.806 132.441,60.859 132.441,59.966 133.217,59.19 J1.47
PC9: J1.48 U2.40 | length 19.6
  Component Side w0.305: v1@120.519,67.998 U2.40
  Solder Side w0.254: v1(120.7,67.95) 120.963,68.213 126.035,68.213 132.441,61.806 136.099,61.806 J1.48
PC10: J1.49 U2.51 | length 26
  Component Side w0.254: U2.51 116.254,66.504 v1(116.55,66.8)
  Signal Layer 1 w0.254: v1(116.55,66.8) 120.156,70.406 cw(c121.952,68.61) 121.952,71.15 124.748,71.15 cw(c124.748,68.61) 126.544,70.406 131.936,65.014 ccw(c133.732,66.81) 133.732,64.27 J1.49
PC11: J1.50 U2.52 | length 28.4
  Component Side w0.254: U2.52 116.328,66.004 116.421,66.098 ; 116.422,66.098 116.525,66.2 v1(117.05,66.2)
  Signal Layer 1 w0.254: v1(117.05,66.2) 116.6,66.2 cw(c116.6,66.95) 115.85,66.95 cw(c117.661,66.95) 116.38,68.23 119.106,70.956 cw(c120.902,69.16) 120.902,71.7 124.773,71.7 cw(c124.773,69.16) 126.569,70.956 129.971,67.554 ccw(c131.767,69.35) 131.767,66.81 J1.50
PC12: J1.51 U2.53 | length 28.5
  Component Side w0.254: U2.53 116.704,65.504 116.8,65.408 v1@116.8,65.4
  Signal Layer 1 w0.254: v1(116.65,65.5) cw(c116.65,66.726) 115.424,66.726 115.424,66.872 cw(c117.964,66.872) 116.168,68.668 118.862,71.362 cw(c120.659,69.566) 120.659,72.106 124.941,72.106 cw(c124.941,69.566) 126.738,71.362 128.006,70.094 ccw(c129.802,71.89) 129.802,69.35 J1.51
PC13: J1.44 R7.2 U2.2 | length 29.8
  Component Side w0.203: v1@115.8,56.95 116.561,56.95 116.925,57.314 116.925,58.06 U2.2 ; R7.2 v1(130.7,52.071) ccw(c130.871,52.071) v1@130.75,51.95
  Component Side w0.254: U2.2 v1@117.019,59.569
  Signal Layer 1 w0.203: v1(115.7,57.15) 115.859,57.309 124.659,57.309 v1(125.15,57.8)
  Solder Side w0.203: v1(125.15,57.8) 125.05,57.8 129.19,53.66 ; J1.44 129.19,53.66 ; v1@130.75,51.95 ccw(c130.388,51.95) 130.644,52.206 129.19,53.66
  other v1: 117.05,59.5
PD2: J1.52 U2.54 | length 28
  Component Side w0.254: U2.54 114.707,64.966 v1@116.1,64.966
  Signal Layer 1 w0.254: v1(116.1,64.9) 115.586,65.414 cw(c117.123,66.95) 114.95,66.95 114.95,66.973 cw(c117.49,66.973) 115.694,68.769 118.731,71.806 cw(c120.527,70.01) 120.527,72.55 125.601,72.55 cw(c125.601,71.702) 125.854,72.511 cw(c125.601,71.702) 126.2,72.302 ccw(c127.194,73.296) 126.843,71.934 ccw(c127.194,73.296) 127.194,71.89 J1.52
USBDM: R1.2 R2.2 U1.2 | length 12.7
  Component Side w0.254: U1.2 115.35,76 ccw(c116.25,76) 116.25,75.1 117.28,75.1 cw(c117.28,72.56) 118.313,74.88 ; R1.2 119.076,74.356 ccw(c117.28,72.56) 118.313,74.88 ; R2.2 123.095,74.136 ccw(c121.299,72.34) 121.299,74.88 118.313,74.88
USBDP: R3.2 R4.2 U1.3 | length 10.1
  Component Side w0.254: U1.3 114.7,75.9 ccw(c115.95,75.9) 115.95,74.65 116.5,74.65 cw(c116.5,73.74) 117.144,74.383 R3.2 118.628,72.899 ccw(c119.6,73.871) 119.6,72.496 120.45,72.496 ccw(c120.45,73.849) 121.407,72.893 R4.2
VBAT: C11.1 D1.2 U2.1 | length 7.9
  Component Side w0.305: C11.1 112.691,56.469 ccw(c112.611,56.55) D1.2 ccw(c112.725,58.542) 114.133,57.133 114.41,57.41 cw(c116.206,55.614) 116.206,58.154 U2.1
pads on no net: J1.4 S1.0 S2.0 U1.0

## Polygon pours and split planes (outlines as drawn)
3.3V on Component Side "Keep-Out Layer-No Net" (solid, pour order 7): 110.9,70.8 110.9,66.75 115.894,66.75 116,70.767
3.3V on Component Side "Keep-Out Layer-No Net" (solid, pour order 3): 111.25,70.95 111.25,72.3 111.85,72.9 112.85,72.9 112.85,72.5 114.996,72.5 114.996,70.767 115,70.55 116.7,70.55 116.75,69.35 124.019,69.354 124.65,69.4 125.6,70.35 125.6,74.75 128.15,74.75 128.1,74.75 128.1,70.9 128.9,70.9 128.9,68.8 128.9,68.805 127.15,68.805 127.15,68.75 126.919,68.75 126.919,67.35 126.919,67.25 125.85,67.25 125.869,67.25 125.869,60.004 cw(c124.019,60.004) 124.019,58.154 116.519,58.154 116.519,58.15 111.75,58.15 111.5,58.15 111.45,59.6 113.9,59.6 113.9,60.2 114.7,60.2 114.669,67.504
GND on Ground Plane (split plane): 140.64,43.56 100.56,43.56 100.56,83.84 140.64,83.84

## Silkscreen, mask and mechanical layers (free items; w line width, h text height)
Top Overlay:
  lines w0.076: 109.95,52.7 110,52.7 ; 110.125,48.34 cw(c110.21,48.34) 110.15,48.4 ; 112.65,49.665 112.68,49.665
  lines w0.203: 106.934,63.754 133.604,63.754 ; 120.269,50.419 120.269,77.089

## Text inside footprints (layer, text, board x,y; h text height)
J1: Bottom Overlay "D0" at 110.368,69.987 h1; Bottom Overlay "D1" at 110.368,67.447 h1; Bottom Overlay "D2" at 110.368,64.907 h1; Bottom Overlay "D3" at 110.368,62.367 h1; Bottom Overlay "D4" at 110.368,59.827 h1; Bottom Overlay "D5" at 110.368,57.287 h1; Bottom Overlay "D6" at 110.368,54.747 h1; Bottom Overlay "D7" at 113.543,51.318 h1; Bottom Overlay "D8" at 116.058,51.318 h1; Bottom Overlay "D9" at 118.572,51.318 h1; Bottom Overlay "D10" at 121.366,51.264 h0.8; Bottom Overlay "D11" at 123.614,51.264 h0.8; Bottom Overlay "D12" at 126.395,51.264 h0.8; Bottom Overlay "D13" at 128.91,51.264 h0.8; Bottom Overlay "A0" at 131.958,54.62 h1; Bottom Overlay "A1" at 131.958,57.181 h1; Bottom Overlay "A2" at 131.958,59.742 h1; Bottom Overlay "A3" at 131.958,62.303 h1; Bottom Overlay "A4" at 131.958,64.865 h1; Bottom Overlay "A5" at 131.958,67.426 h1; Bottom Overlay "RST" at 131.958,69.987 h1; Bottom Overlay "GND" at 128.925,73.537 h0.8; Bottom Overlay "3V3" at 126.258,73.537 h0.8; Bottom Overlay "5V" at 123.464,73.537 h0.8; Bottom Overlay "AREF" at 121.432,73.537 h0.8; Solder Side "MAGI" at 135.667,47.887 h0.8